# Altium PCB Modulo_Wifi_Pedidos_Domicilo.PcbDoc
Units mm, origin at the board's own origin, x right, y up, seen from the top; angles counter-clockwise.
Board outline 50.04 x 62.22 mm, 2 copper layers (Top Layer, Bottom Layer); 38 components, 41 nets, 155 pads, 48 vias.
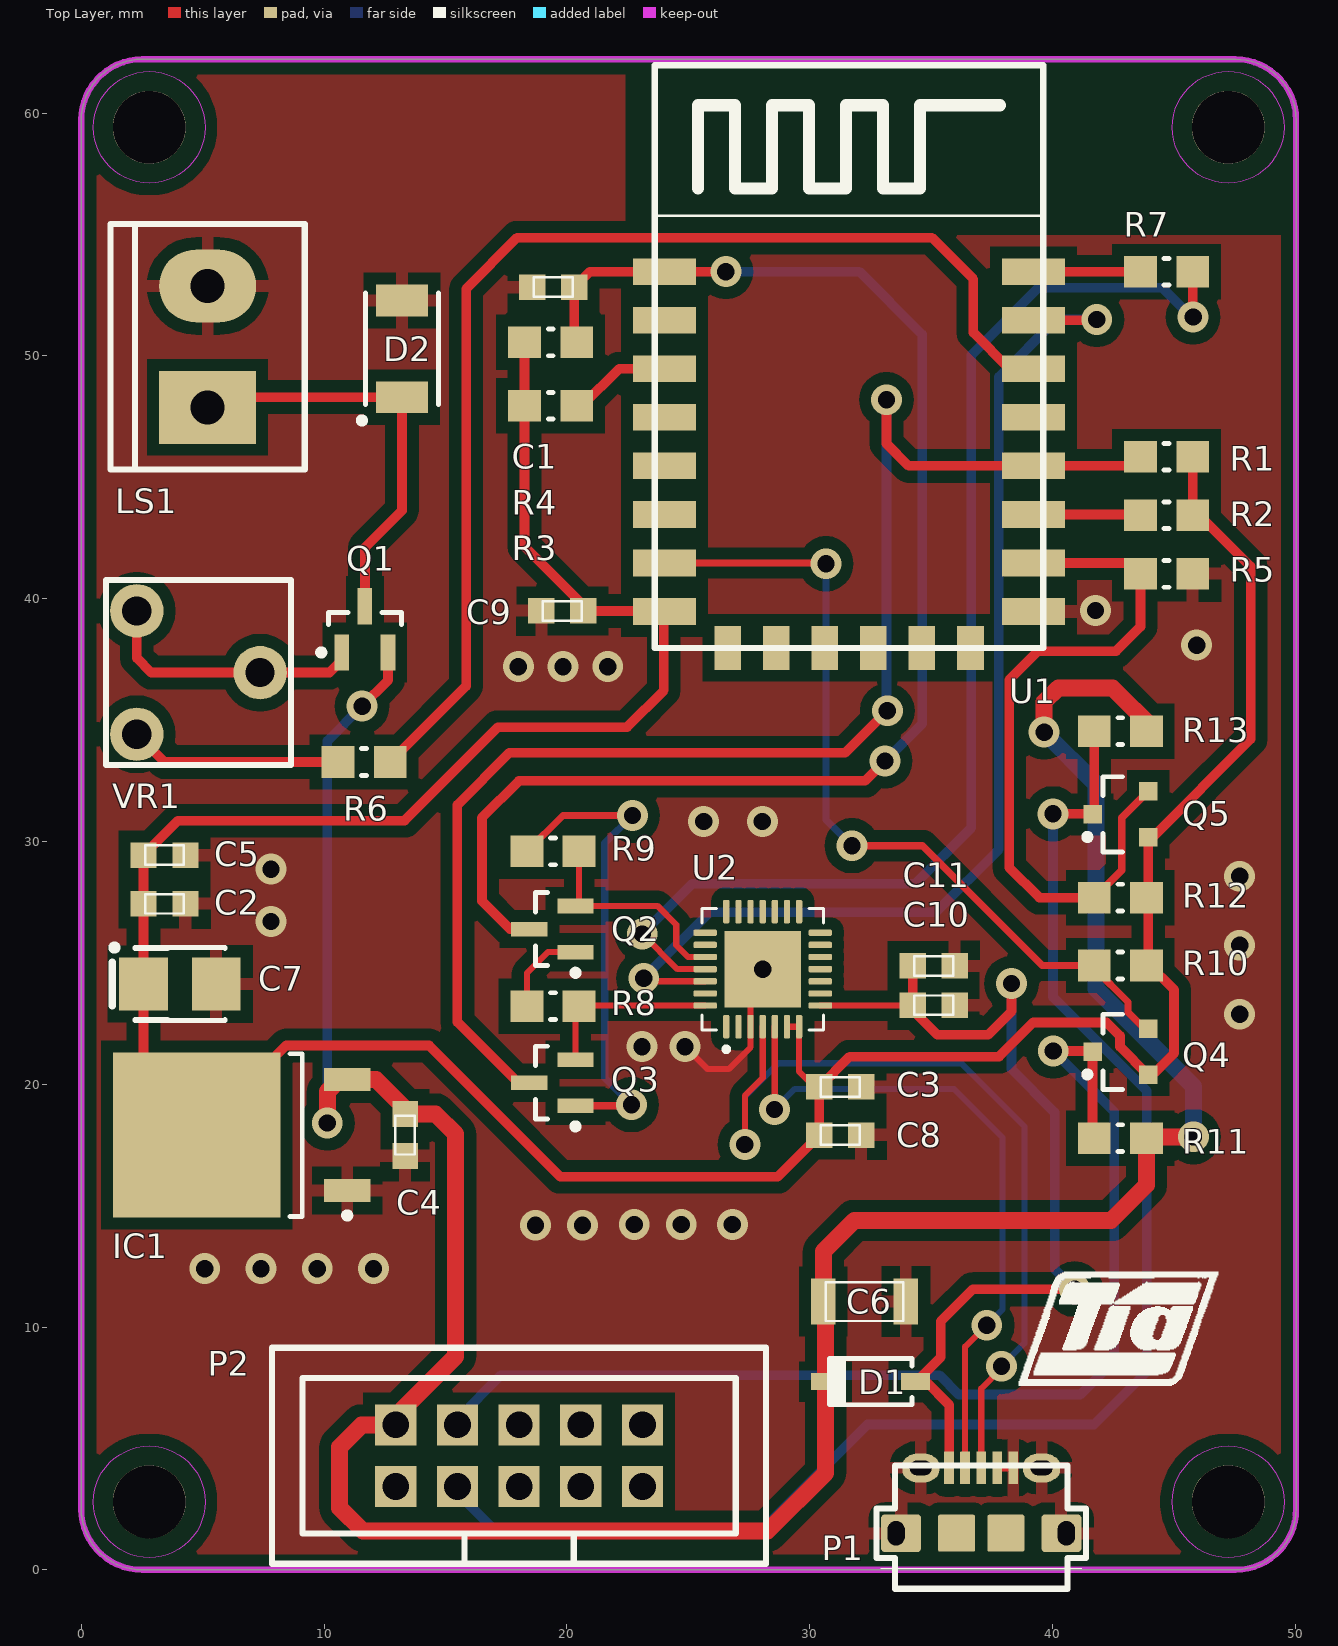
[diagram p0: Top Layer view]
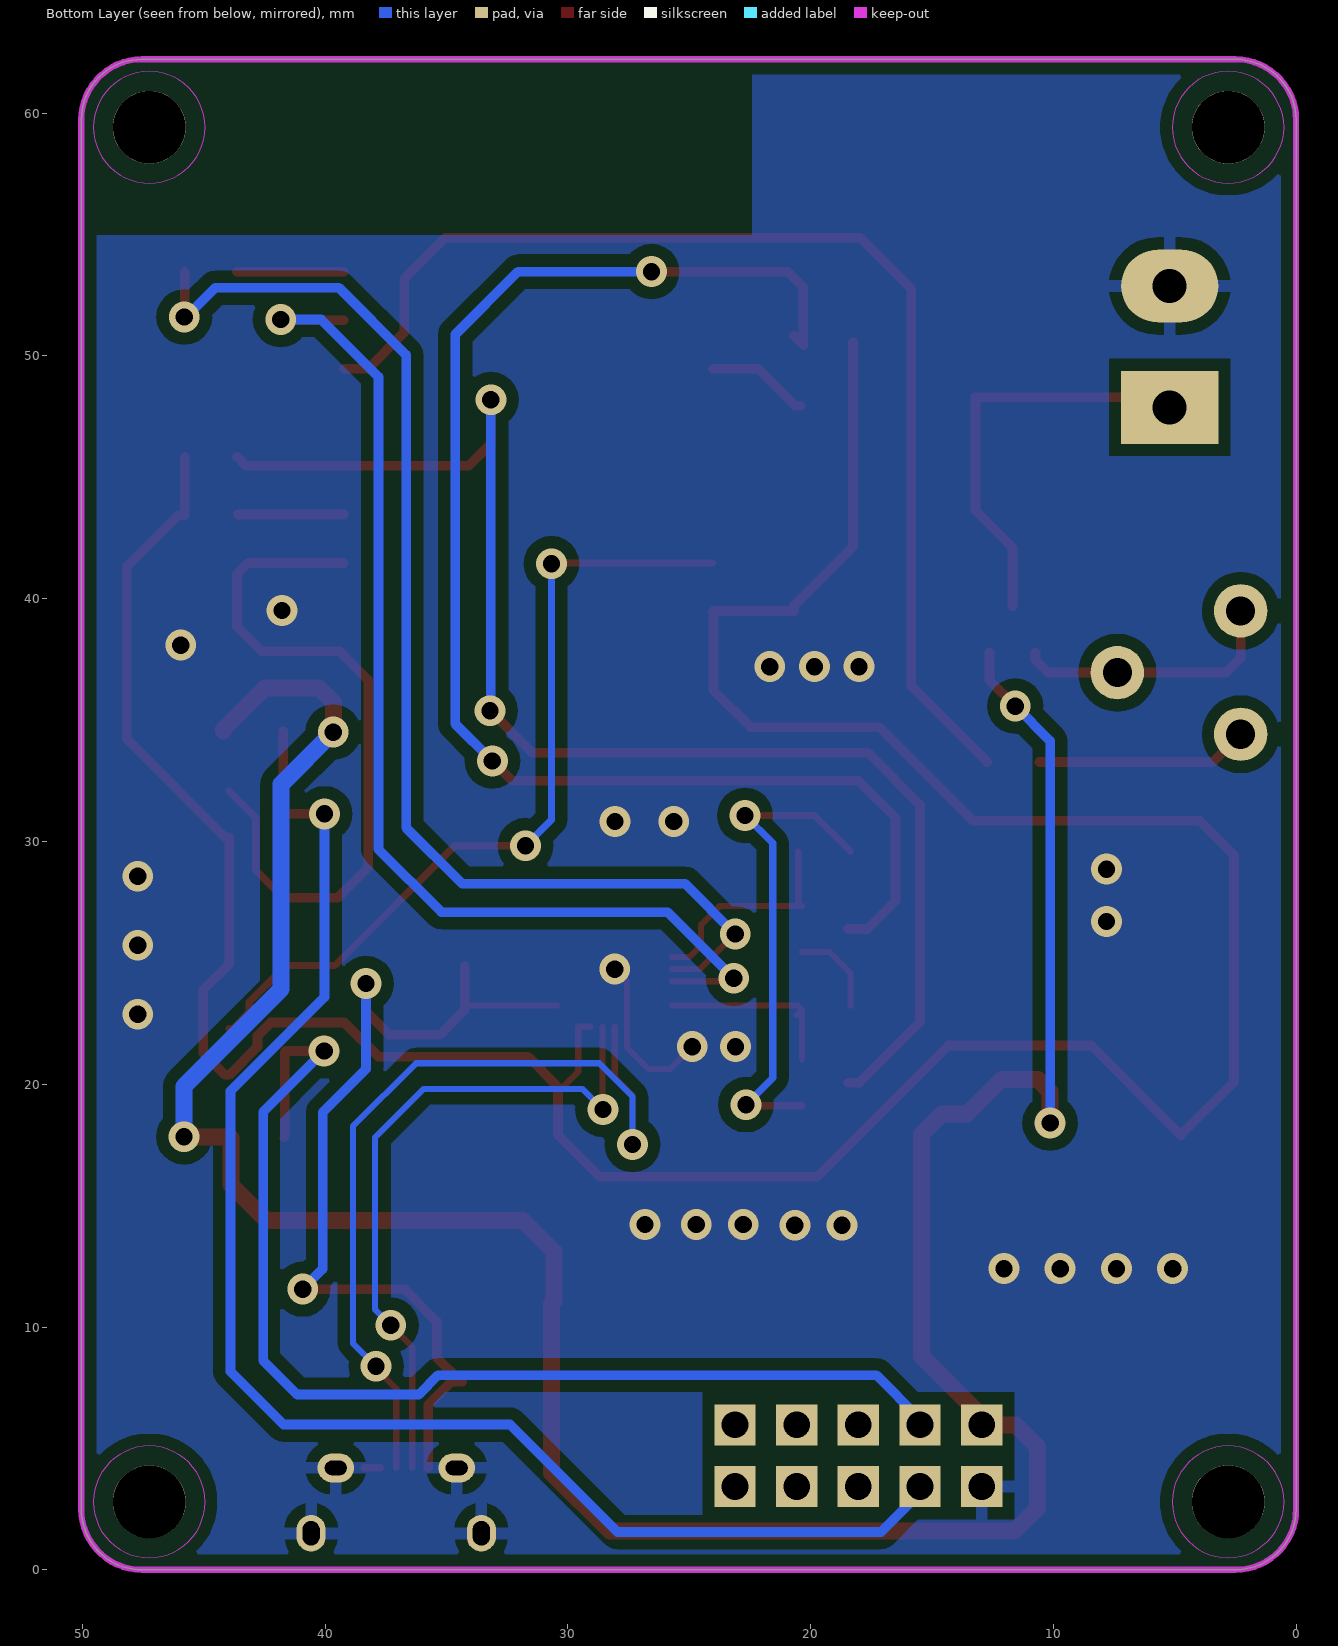
[diagram p1: Bottom Layer view, seen from below]
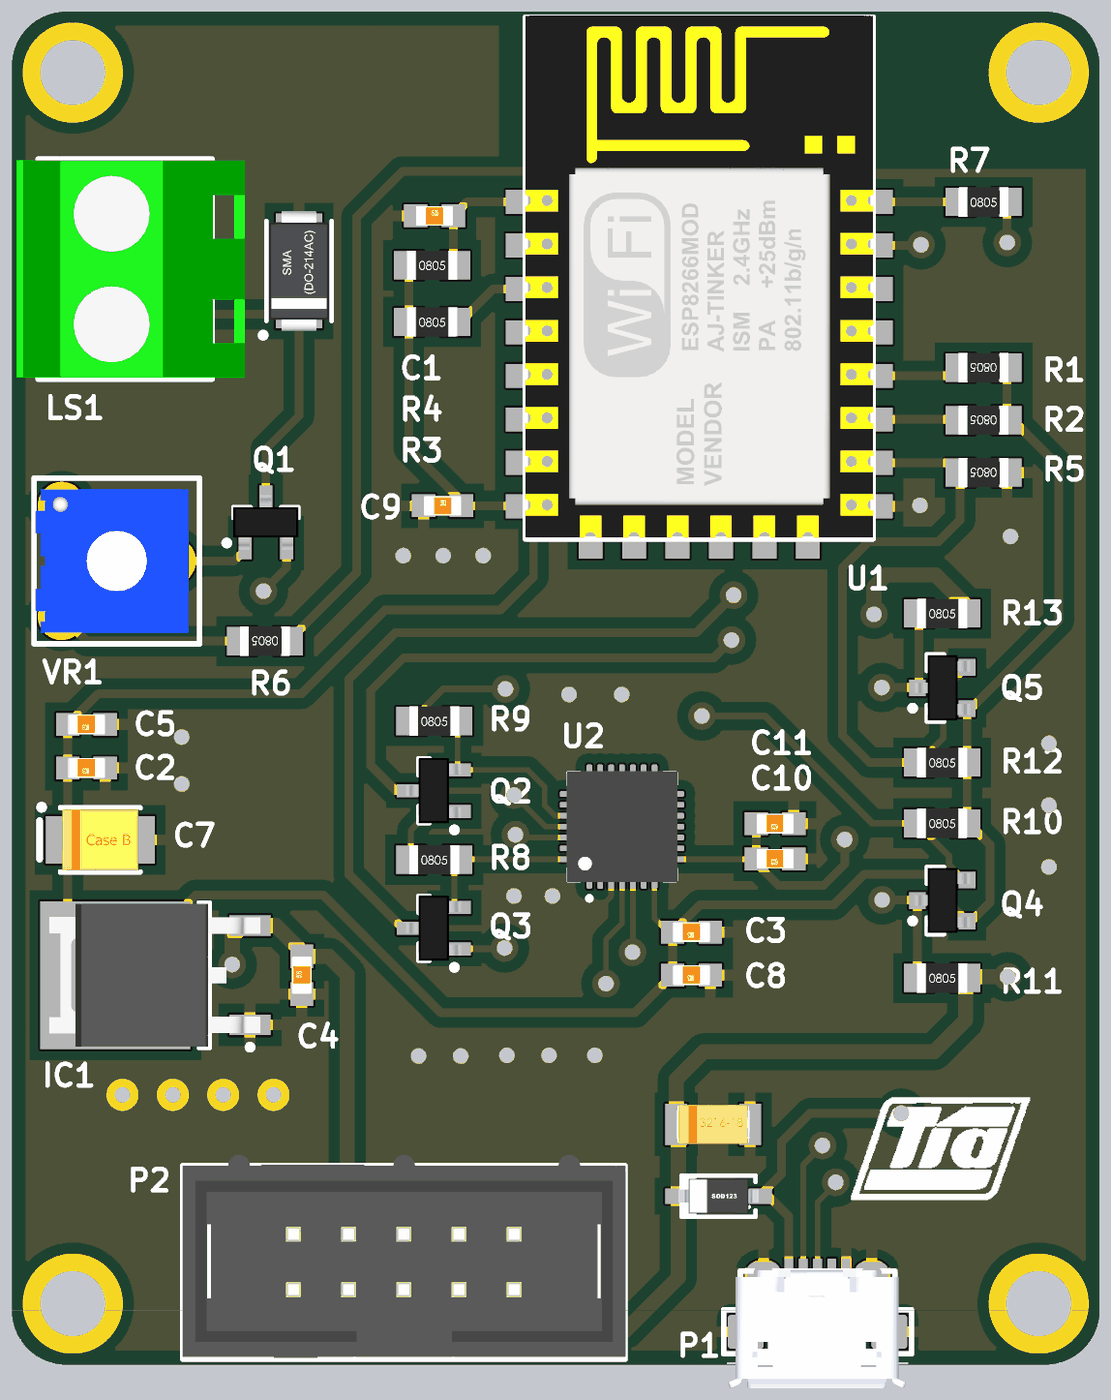
[diagram p2: 3D render of the assembled board from above, using the file's embedded part models]

## Layer stack, top to bottom
Top Solder: solder mask 0.0102, Solder Resist, Dk 3.5
Top Layer: signal copper 0.0356
Dielectric 1: dielectric 0.32, FR-4, Dk 4.8
Bottom Layer: signal copper 0.0356
Bottom Solder: solder mask 0.0102, Solder Resist, Dk 3.5

## Board outline
2.5,0 cw(c2.5,2.5) 0,2.5 0,59.718 cw(c2.5,59.718) 2.5,62.218 47.54,62.218 cw(c47.54,59.718) 50.04,59.718 50.04,2.5 cw(c47.54,2.5) 47.54,0

## Design rules (kind name [scope] priority, off if disabled: settings)
Clearance Polygone [All vs InPolygon] p1: gap=0.5
Clearance CP2102 [InNetClass('CP2102')] p2: gap=0.15
Clearance USB [All vs HasFootprint('USB_MICRO_B_AT')] p3: gap=0.15
Clearance [All] p4: gap=0.254
HoleSize [All] p1: absolutevalues=TRUE maxlimit=10 minlimit=0.025 maxpercent=80.000 minpercent=20.000
MinimumSolderMaskSliver [All] p1: minsoldermaskwidth=0
PolygonConnect GND [InNet('GND') vs IsVia] p1: connectstyle=Direct reliefconductorwidth=0.254 reliefentries=4 polygonreliefangle="90 Angle" airgapwidth=0.254
PolygonConnect [All] p2: connectstyle=Relief reliefconductorwidth=0.5 reliefentries=4 polygonreliefangle="90 Angle" airgapwidth=0.5
RoomDefinition SH4 [InComponentClass('SH4')] p1: confinementstyle=ConfineIn formatcopy=TRUE lockcomponents=FALSE outline -5.588,-8.255 238.379,-8.255 238.379,108.331 -5.588,108.331
RoomDefinition SH3 [InComponentClass('SH3')] p2: confinementstyle=ConfineIn formatcopy=TRUE lockcomponents=FALSE outline -5.588,-8.255 238.379,-8.255 238.379,108.331 -5.588,108.331
RoomDefinition SH2 [InComponentClass('SH2')] p3: confinementstyle=ConfineIn formatcopy=TRUE lockcomponents=FALSE outline -5.588,-8.128 238.252,-8.128 238.252,108.331 -5.588,108.331
RoomDefinition main_sheet [InComponentClass('main_sheet')] p4: confinementstyle=ConfineIn formatcopy=TRUE lockcomponents=FALSE outline -5.588,-8.001 238.125,-8.001 238.125,108.331 -5.588,108.331
RoutingVias [All] p1: holewidth=0.711 width=1.27 viastyle="Through Hole" minholewidth=0.711 minwidth=1.27 maxholewidth=0.711 maxwidth=1.27
SilkToSilkClearance [All] p1: silktosilkclearance=0
SilkToSolderMaskClearance [IsPad] p1: minsilkscreentomaskgap=0 clearancetoexposedcopper=TRUE
SolderMaskExpansion [All] p1: expansion=0.102
Width [All] p1: maxlimit=8 minlimit=0.254 preferedwidth=0.3
26 further rules are at their usual default settings.

## Classes and differential pairs
component class main_sheet: C4 C5 C6 C7 D1 D2 IC1 LS1 P1 P2 Q1 R6 VR1
component class SH2: C1 C2 C3 R1 R2 R3 R4 R5 U1
component class SH3: C8 C9 C10 C11 Q2 Q3 R7 R8 R9 U2
component class SH4: Q4 Q5 R10 R11 R12 R13
net class CP2102: +3.3VDC ACTIVE CTS DCD DSR DTR ESP_RXD0 ESP_TXD0 GND NetR7_2 NetU2_9 NetU2_12 NetU2_18 RI RTS USB_M USB_P VUSB

## Components (designator, comment, footprint, x,y, rotation, side; value= is the part's Value field where it differs from the comment)
C1 "CL10B104KC8NNNC" C0603C104K5RACTU 19.443,52.832 r0 top
C2 "CL10B104KC8NNNC" C0603C104K5RACTU 3.429,27.432 r180 top
C3 "CL10B104KC8NNNC" C0603C104K5RACTU 31.266,19.889 r180 top
C4 "CL10B104KC8NNNC" C0603C104K5RACTU 13.335,17.907 r90 top
C5 "CL10B104KC8NNNC" C0603C104K5RACTU 3.429,29.437 r180 top
C6 "T491A106K010AT2478" "3216 Case-A" 32.262,11.049 r0 top
C7 "T491B107M010AT" TAJB107M006RNJ 4.064,24.13 r0 top
C8 "CL10B104KC8NNNC" C0603C104K5RACTU 31.266,17.907 r180 top
C9 "CL10A106KP8NNNC" C0603C104K5RACTU 19.812,39.497 r0 top
C10 "CL10B104KC8NNNC" C0603C104K5RACTU 35.112,23.256 r180 top
C11 "CL10A106KP8NNNC" C0603C104K5RACTU 35.112,24.877 r180 top
D1 "B5817WS" "Diode S4" 32.512,7.747 r0 top
D2 "SS32" DO-214AC) 13.208,50.292 r90 top
IC1 "LD1117ADT33TR" TO252 6.604,17.907 r180 top
LS1 "KF103-5.0-2P" "VERDE 2pin" 5.207,47.879 r90 top
P1 "C10418" USB_MICRO_B_AT 37.084,1.524 r180 top
P2 "Z-231011010106" IDC5X2 18.034,4.699 r180 top
Q1 "MMBT3906LT1G" SOT-23-TT3_N 11.684,38.735 r90 top
Q2 "MMBT3904LT3G" SOT-23-TT3_N 19.406,26.392 r180 top
Q3 "MMBT3904LT3G" SOT-23-TT3_N 19.406,20.066 r180 top
Q4 "2N7002A-7" SuperSOT-3 42.799,21.336 r180 top
Q5 "2N7002A-7" SuperSOT-3 42.799,31.115 r180 top
R1 "ERJ6RBD1202V" RES-0805 44.704,45.847 r180 top
R2 "ERJ6RBD1202V" RES-0805 44.704,43.434 r180 top
R3 "ERJ6RBD1202V" RES-0805 19.332,47.949 r0 top
R4 "ERJ6RBD1202V" RES-0805 19.332,50.559 r0 top
R5 "ERJ6RBD1202V" RES-0805 44.704,41.021 r180 top
R6 "TC0525D1000T5E" RES-0805 11.647,33.272 r180 top
R7 "0805W8F4700T5E" RES-0805 44.704,53.467 r0 top
R8 "0805W8F1202T5E" RES-0805 19.431,23.217 r0 top
R9 "0805W8F1202T5E" RES-0805 19.431,29.591 r0 top
R10 "0805W8F1002T5E" RES-0805 42.799,24.892 r0 top
R11 "0805W8F1002T5E" RES-0805 42.799,17.78 r0 top
R12 "0805W8F1002T5E" RES-0805 42.799,27.686 r0 top
R13 "0805W8F1002T5E" RES-0805 42.799,34.544 r0 top
U1 "ESP-12F(ESP8266MOD)" "ESP-12E&F Module" 31.623,45.72 r0 top
U2 "CP2102-GMR" QFN50P500X500X100-29N 28.067,24.741 r90 top
VR1 "3362P-1-502LF" "POT LIN VR1" 4.826,36.957 r270 top

## Footprints (in the part's own frame and the unit in brackets; to place one, negate y for a bottom-side part, rotate by r counter-clockwise, add the part's x,y. Pads: shape width x height; smd on the part's side, far side on the other; paste and mask are expansions set on the pad)
"3216 Case-A" [mm] "CAP TANT 10UF 6.3V 20% 1206"
  rect 1x1.9 smd: 1(-1.7,0) 2(1.7,0)
  silkscreen extent -1.6,-0.8 1.6,0.8, body extent -1.7,-0.9 1.7,0.9, height 1.7
C0603C104K5RACTU [mm] "100nF"
  rect 1.08x1.05 smd: 1(-0.865,0) 2(0.865,0)
  silkscreen extent -0.8,-0.4 0.8,0.4, body extent -0.79,-0.41 0.81,0.39, height 0.3
"Diode S4" [mm] "Molded Capacitor, 2-Leads, Body 3,20x1,60mm, IPC Medium Density"
  rect 1.2x0.7 smd: 1(-1.85,0) 2(1.85,0)
  silkscreen extent -1.7,-0.95 1.7,0.95, body extent -1.85,-0.8 1.85,0.8, height 1.27
DO-214AC) [mm] "Molded Diode, 2-Leads, Body 4,31x2,60mm, IPC Medium Density"
  rect 1.3x2.15 smd: 1(-1.99,0) 2(1.99,0)
  silkscreen extent -3.07,-1.5 2.3,1.77, body extent -2.75,-1.4 2.75,1.4, height 2.6
"ESP-12E&F Module" [mm]
  rect 2.6x1.1 smd: 1(-7.6,7.75) 2(-7.6,5.75) 3(-7.6,3.75) 4(-7.6,1.75) 5(-7.6,-0.25) 6(-7.6,-2.25) 7(-7.6,-4.25) 8(-7.6,-6.25) 15(7.6,-6.25) 16(7.6,-4.25) 17(7.6,-2.25) 18(7.6,-0.25) 19(7.6,1.75) 20(7.6,3.75) 21(7.6,5.75) 22(7.6,7.75)
  rect 1.1x1.8 smd: 9(-5,-7.75) 10(-3,-7.75) 11(-1,-7.75) 12(1,-7.75) 13(3,-7.75) 14(5,-7.75)
  silkscreen extent -8,-7.75 8,16.25, body extent -8.01,-7.69 8.01,16.32, height 2.65
IDC5X2 [mm] "IDC5X2"
  rect 1.7x1.7 hole 1.1: 1(-5.08,-1.27) 2(-5.08,1.27) 3(-2.54,-1.27) 4(-2.54,1.27) 5(0,-1.27) 6(0,1.27) 7(2.54,-1.27) 8(2.54,1.27) 9(5.08,-1.27) 10(5.08,1.27)
  silkscreen extent -10.17,-4.45 10.17,4.45, body extent -10.21,-4.95 10.19,4.4, height 9.43
"POT LIN VR1" [mm] "POT LIN VR1"
  round 2.2 hole 1.2: 1(-2.54,-2.54) 2(0,2.54) 3(2.54,-2.54)
  silkscreen extent -3.81,-3.81 3.81,3.81, body extent -3.3,-3.75 3.3,3.3, height 4.7
QFN50P500X500X100-29N [mm]
  rrect50% 0.97x0.26 smd: 1(-2.37,1.5) 2(-2.37,1) 3(-2.37,0.5) 4(-2.37,0) 5(-2.37,-0.5) 6(-2.37,-1) 7(-2.37,-1.5) 15(2.37,-1.5) 16(2.37,-1) 17(2.37,-0.5) 18(2.37,0) 19(2.37,0.5) 20(2.37,1) 21(2.37,1.5)
  rrect50% 0.26x0.97 smd: 8(-1.5,-2.37) 9(-1,-2.37) 10(-0.5,-2.37) 11(0,-2.37) 12(0.5,-2.37) 13(1,-2.37) 14(1.5,-2.37) 22(1.5,2.37) 23(1,2.37) 24(0.5,2.37) 25(0,2.37) 26(-0.5,2.37) 27(-1,2.37) 28(-1.5,2.37)
  rect 3.15x3.15 smd: 29(0,0)
  silkscreen extent -3.4,-2.5 2.5,2.5, body extent -2.55,-2.55 2.55,2.55, height 1
RES-0805 [mm] "Chip Resistor, 2-Leads, Body 2,00x1,25mm, IPC Medium Density"
  rect 1.35x1.3 smd: 1(-1.075,0) 2(1.075,0)
  silkscreen extent -0.1,-0.55 0.1,0.55, body extent -1.15,-0.67 1.15,0.68, height 0.76
SOT-23-TT3_N [mm] "SOT23, 3-Leads, Body 2.9x1.3mm, Pitch 0.95mm, Lead Span 2.4mm, IPC Medium Density"
  rect 1.5x0.6 smd: 1(-0.95,0.95) 2(-0.95,-0.95) 3(0.95,0)
  silkscreen extent -1.07,-1.5 0.7,1.92, body extent -1.27,-1.5 1.27,1.5, height 1.1
SuperSOT-3 [mm] "SOT23, 3-Leads, Body 2,98x2,52mm, Pitch 0,95mm, IPC Medium Density"
  rect 0.76x0.76 smd: 1(-1.145,-0.95) 2(-1.145,0.95) 3(1.145,0)
  silkscreen extent -0.09,-1.55 1.48,1.55, body extent -1.29,-1.51 1.25,1.49, height 1.1
TAJB107M006RNJ [mm] "Capacitor, SM Tantalum; Body 3.5 x 2.8 mm (LxW typ)"
  rect 2x2.2 smd: 1(-1.5,0) 2(1.5,0)
  silkscreen extent -2.82,-1.5 1.85,1.62, body extent -1.75,-1.4 1.75,1.4, height 1.9
TO252 [mm] "D-PAK, 3-Pads, Body 6.2x6.7mm (max), IPC Medium Density"
  rect 1.9x0.95 smd: 1(-4.35,2.285) 3(-4.35,-2.285)
  rect 6.9x6.8 smd: 4(1.85,0)
  silkscreen extent -4.47,-3.35 -2,3.43, body extent -4.83,-3.29 4.87,3.29, height 2.3
USB_MICRO_B_AT [mil] "USB_MICRO_B_AT"
  oval 47.24x59.06 hole 27.56 slot 39.37 at 90 deg: 0(-137.33,0.67) 0(138.67,0.67)
  rrect20% 65x61 smd: 0(-129.33,0.67) 0(130.67,0.67)
  oval 59.06x47.24 hole 23.62 slot 35.43 at 0 deg: 0(-97.33,-105.33) 0(98.67,-105.33)
  rrect80% 60x40 smd: 0(-97.33,-105.33) 0(98.67,-105.33)
  rrect10% 16x53 smd: 1(52.67,-105.33) 2(26.67,-105.33) 3(0.67,-105.33) 4(-51.33,-105.33) 4(-25.33,-105.33)
  rrect10% 60x60 smd: S1(40.67,0.67) S2(-39.33,0.67)
  silkscreen extent -169,-109 171,91, body extent -160,-111 163,103, height 105
"VERDE 2pin" [mm] "bornera verde"
  rect 3x4 hole 1.4: 1(0,0)
  oval 3x4 hole 1.4: 2(5,0)
  silkscreen extent -2.56,-4 7.56,4, body extent -2.5,-5.51 7.5,4.99, height 14

## Part data
C1 C2 C3 C4 C5 C8 C9 C10 C11: library part "Cap 100nF (0603)"
C6: library part T491A106M006AT, "CAP TANT 10UF 6.3V 20% 1206"
C7: library part "Cap 10uF (C3216)", "Capacitor"
D1: library part 1N5817
D2: library part CD214A-B340LF, "DIODE SCHOTTKY 40V 3A SMA"
IC1: library part LM1117DT, "800mA Low-Dropout Linear Regulator"
LS1: library part Speaker, "Speaker"
P1: library part "USB Mini", "USB Micro"
P2: library part "IDC  5X2", "Header, 5-Pin, Dual row"
Q1: library part 2N3906
Q2 Q3: library part 2N3904
Q4 Q5: library part "MOSFET N channel", "N-Channel MOSFET"
R1 R2 R3 R4 R5 R6 R7 R8 R9 R10 R11 R12 R13: library part Resistor, "Resistor"
U1: library part "ESP-12E&F Module", "ESP-12E&F Module"
U2: library part CP2102-GM
VR1: library part "Trimmer Cermet 104", "Trimmer Cermet 104"

## Free pads (board coordinates)
  round 3 hole 3 unplated: ""(2.8,2.8) ""(2.8,59.418) ""(47.24,2.8) ""(47.24,59.418)

## Via types
v1: diameter 1.27, hole 0.711, Top Layer to Bottom Layer, tented both sides, 43 vias
v2: diameter 1.27, hole 0.711, Top Layer to Bottom Layer, 4 vias
v3: diameter 1.27, hole 0.711, Top Layer to Bottom Layer, tented bottom, 1 vias

## Nets (pads, with @x,y where several pads share a name; then routed paths per layer and width w, separated by ;. In a path a pad name is that pad's centre, name@x,y a point inside that pad or via, vN(x,y) a via of type N, cw(c..) or ccw(c..) an arc to the next point about the centre after c; other vN are vias at no path point)
+3.3VDC: C2.2 C3.2 C5.2 C7.1 C8.2 C9.2 IC1.4 Q4.2 Q5.2 R1.1 R2.1 R3.1 R4.1 R10.2 R12.2 U1.8 U2.6 U2.7 | length 136.3
  Top Layer w0.254: U2.6 U2.7 29.567,20.519 C3.2@30.401,19.685
  Top Layer w0.4: R4.1 R3.1 18.257,42.145 20.677,39.725 C9.2 U1.8@23.996,39.497 ; U1.8 U1.8@23.996,39.497 ; R1.1 R2.1 46.058,43.434 48.166,41.326 48.166,34.214 44.117,30.165 Q5.2 43.944,24.962 45.01,23.896 45.01,21.273 44.123,20.386 Q4.2 42.783,21.547 42.783,21.995 42.231,22.547 39.208,22.547 37.797,21.136 31.648,21.136 C3.2 30.401,19.685 C8.2 28.681,16.187 19.733,16.187 14.328,21.592 8.439,21.592 IC1.4 2.564,20.097 C7.1 C2.2 2.564,29.21 C5.2 3.981,30.854 13.313,30.854 17.167,34.708 22.478,34.708 23.996,36.226 U1.8@23.996,39.497
+5VDC: C4.2 C6.1 D1.1 IC1.3 P2.9 Q1.2 R11.2 R13.2 | length 121.2
  Top Layer w0.4: v1(11.569,35.574) 12.634,36.639 Q1.2
  Top Layer w0.7: v1(10.134,18.4) 10.134,19.694 10.632,20.192 IC1.3 12.143,20.192 13.563,18.772 14.595,18.772 15.423,17.944 15.423,8.796 12.954,6.327 P2.9 11.551,5.969 10.645,5.063 10.645,2.55 11.603,1.592 28.262,1.592 30.662,3.992 D1.1 30.662,10.949 C6.1 30.562,13.109 31.84,14.387 42.417,14.387 43.874,15.844 R11.2 43.929,17.835 v1(45.806,17.835) ; v1(39.659,34.503) 39.659,35.739 40.243,36.323 42.48,36.323 44.172,34.631 R13.2@44.172,34.544
  Bottom Layer w0.4: v1(10.134,18.4) 10.134,34.139 v1(11.569,35.574)
  Bottom Layer w0.7: v1(39.659,34.503) 41.805,32.357 41.805,23.917 45.806,19.916 v1(45.806,17.835)
ACTIVE: U2.11
ADC: U1.2
CTS: U2.23
DCD: U2.1
DSR: U2.27
DTR: Q3.2 R8.2 U2.28 | length 7.6
  Top Layer w0.254: Q3.2 20.356,23.067 R8.2@20.574,22.849 ; R8.2 20.53,23.241 U2.28
EN: R3.2 U1.3 | length 4.2
  Top Layer w0.4: R3.2 20.634,47.949 22.155,49.47 U1.3
ESP_RXD0: U1.21 U2.26 | length 46.5
  Top Layer w0.254: v1(23.167,24.367) 23.293,24.241 U2.26
  Top Layer w0.4: U1.21 41.797,51.47 v1(41.826,51.499)
  Bottom Layer w0.4: v1(23.167,24.367) 25.889,27.089 35.209,27.089 37.795,29.675 37.795,49.136 40.158,51.499 v1(41.826,51.499)
ESP_RXD2: Q4.1 R10.1 U1.7 | length 34.4
  Top Layer w0.3: U1.7 30.645,41.47 v1(30.675,41.44) ; v1(31.744,29.826) 34.653,29.826 39.587,24.892 R10.1 41.724,24.78 43.116,23.388 43.116,22.963 43.793,22.286 Q4.1
  Bottom Layer w0.3: v1(30.675,41.44) 30.675,30.895 v1(31.744,29.826)
ESP_TXD0: R7.1 U1.22 | length 4.4
  Top Layer w0.4: U1.22 43.626,53.47 R7.1
ESP_TXD2: Q5.1 R5.2 R12.1 U1.16 | length 30.1
  Top Layer w0.3: R12.1 42.857,28.819 42.857,30.978 Q5.1
  Top Layer w0.4: U1.16 43.18,41.47 R5.2 43.629,38.849 42.617,37.837 39.401,37.837 38.222,36.658 38.222,28.93 39.466,27.686 R12.1
FLASH: Q3.3 R1.2 U1.18 | length 57.9
  Top Layer w0.4: Q3.3 17.981,20.066 15.492,22.555 15.492,31.505 17.642,33.655 31.472,33.655 v1(33.201,35.384) ; v1(33.169,48.196) 33.169,46.382 34.081,45.47 U1.18 43.252,45.47 R1.2
  Bottom Layer w0.4: v1(33.169,48.196) 33.169,35.483 33.136,35.45 v1(33.201,35.384)
GND: C1.1 C2.1 C3.1 C4.1 C5.1 C6.2 C7.2 C8.1 C9.1 C10.1 C11.1 D2.2 IC1.1 LS1.2 P1.0 P1.4 P2.10 R5.1 U1.15 U2.3 U2.29 | length 7.5
  Top Layer w0.254: v1(24.871,21.549) 25.795,20.625 26.661,20.625 27.567,21.531 U2.3 27.567,24.241 v3(28.067,24.741)
  Top Layer w0.3: P1.4@37.727,4.199 P1.4@38.388,4.199
  other v1: 18.711,14.191 20.648,14.191 22.775,14.223 24.712,14.223 26.818,14.223 23.097,21.549 47.713,22.885 47.713,25.726 7.811,26.7 47.713,28.567 7.811,28.86 25.634,30.819 28.054,30.819 18.003,37.201 19.842,37.201 21.682,37.201 45.941,38.086 41.777,39.515
  other v2: 5.087,12.404 7.404,12.404 9.721,12.404 12.038,12.404
GPIO2: R2.2 U1.17 | length 4.4
  Top Layer w0.4: U1.17 R2.2@43.593,43.47
GPIO4: U1.19
GPIO5: R6.1 U1.20 | length 48.6
  Top Layer w0.4: R6.1 15.852,36.402 15.852,52.763 17.957,54.868 35.034,54.868 36.741,53.161 36.741,50.957 38.228,49.47 U1.20
GPIO9: U1.11
GPIO10: U1.12
GPIO12: U1.6
GPIO14: U1.5
GPIO16: U1.4
H_RX: P2.8 Q5.3 R13.1 | length 61.7
  Top Layer w0.3: Q5.3 Q5.3@41.724,31.185
  Top Layer w0.4: v1(40.024,31.138) 41.599,31.138 Q5.3@41.638,31.099 ; Q5.3@41.724,31.185 R13.1
  Bottom Layer w0.254: P2.8@15.494,3.162 P2.8
  Bottom Layer w0.4: P2.8@15.494,3.162 17.1,1.556 27.956,1.556 32.384,5.984 41.711,5.984 43.892,8.165 43.892,19.718 40.024,23.586 v1(40.024,31.138)
H_TX: P2.7 Q4.3 R11.1 | length 47.9
  Top Layer w0.3: R11.1@41.654,17.85 R11.1
  Top Layer w0.4: v1(40.037,21.369) Q4.3@41.621,21.369 ; R11.1@41.654,17.85 Q4.3
  Bottom Layer w0.4: P2.7 15.494,6.221 17.29,8.017 35.34,8.017 36.139,7.218 41.149,7.218 42.549,8.618 42.549,18.857 v1(40.037,21.369)
NetD2_1: D2.1 LS1.1 Q1.3 | length 17.4
  Top Layer w0.4: LS1.1 5.63,48.302 D2.1 13.208,43.632 11.684,42.108 Q1.3
NetQ1_1: Q1.1 VR1.1 VR1.2 | length 11.2
  Top Layer w0.4: VR1.1 2.286,37.552 2.881,36.957 VR1.2 10.223,36.957 10.734,37.468 Q1.1
NetQ2_1: Q2.1 R8.1 | length 3.7
  Top Layer w0.254: R8.1 18.356,24.579 19.219,25.442 Q2.1
NetQ3_1: Q3.1 R9.1 | length 20.1
  Top Layer w0.3: R9.1 19.838,31.073 v1(22.703,31.073) ; Q3.1 22.621,19.116 v1(22.664,19.159)
  Bottom Layer w0.3: v1(22.664,19.159) 21.564,20.259 21.564,29.934 v1(22.703,31.073)
NetR6_2: R6.2 VR1.3 | length 8.8
  Top Layer w0.4: VR1.3 3.431,33.272 R6.2
NetR7_2: R7.2 U2.25 | length 50.8
  Top Layer w0.254: v1(23.104,26.193) 24.556,24.741 U2.25
  Top Layer w0.4: R7.2 45.779,51.549 45.797,51.567 v1(45.797,51.602)
  Bottom Layer w0.4: v1(23.104,26.193) 25.17,28.259 34.353,28.259 36.659,30.565 36.659,50.035 39.435,52.811 44.517,52.811 45.726,51.602 v1(45.797,51.602)
NRST: C1.2 Q2.3 R4.2 U1.1 | length 60.1
  Top Layer w0.4: Q2.3 17.66,26.392 16.502,27.55 16.502,30.978 18.023,32.499 32.288,32.499 v1(33.107,33.318) ; R4.2@20.283,50.435 20.308,50.46 C1.2 20.946,53.47 U1.1 ; R4.2 R4.2@20.684,50.836 ; U1.1@24.024,53.471 v1(26.55,53.471)
  Bottom Layer w0.4: v1(26.55,53.471) 32.046,53.471 34.636,50.881 34.636,34.847 v1(33.107,33.318)
RI: U2.2
RTS: Q2.2 R9.2 U2.24 | length 8.8
  Top Layer w0.254: Q2.2 23.739,27.342 24.509,26.572 24.509,25.724 24.992,25.241 U2.24 ; Q2.2@20.506,27.492 R9.2
SPI_INT: U1.13
SPI_MISO: U1.10
SPI_MOSI: U1.9
SPI_SCK: U1.14
USB_M: P1.2 U2.5 | length 28.2
  Top Layer w0.254: v1(28.551,18.964) 28.567,18.979 U2.5 ; P1.2 36.407,9.189 v1(37.293,10.075)
  Bottom Layer w0.254: v1(28.551,18.964) 29.397,19.809 35.938,19.809 37.938,17.809 37.938,10.72 v1(37.293,10.075)
USB_P: P1.3 U2.4 | length 35.1
  Top Layer w0.254: v1(27.333,17.518) 27.333,19.531 28.067,20.265 U2.4 ; P1.3 37.067,7.464 v1@37.899,8.296
  Top Layer w0.4: v1@37.899,8.296 v1(37.899,8.383)
  Bottom Layer w0.254: v1(27.333,17.518) 27.333,19.494 28.707,20.868 36.246,20.868 38.848,18.266 38.848,9.332 v1(37.899,8.383)
VUSB: C10.2 C11.2 D1.2 P1.1 U2.8 | length 38.7
  Top Layer w0.254: U2.8 34.232,23.241 C10.2 ; C10.2@34.247,23.056 C10.2@34.247,23.226
  Top Layer w0.4: C10.2@34.247,23.056 35.269,22.034 37.347,22.034 38.314,23.001 v1(38.314,24.146) ; C10.2 C11.2 ; P1.1 35.746,6.799 34.798,7.747 D1.2 34.395,7.747 35.399,8.751 35.399,10.232 36.727,11.56 v1(40.917,11.56)
  Bottom Layer w0.4: v1(38.314,24.146) 38.314,20.627 40.095,18.846 40.095,12.382 v1(40.917,11.56)
pads on no net: P1.S1 P1.S2 P2.1 P2.2 P2.3 P2.4 P2.5 P2.6 U2.9 U2.10 U2.12 U2.13 U2.14 U2.15 U2.16 U2.17 U2.18 U2.19 U2.20 U2.21 U2.22

## Polygon pours and split planes (outlines as drawn)
GND on Top Layer "PolygoneTOP" (solid, pour order 0): 2.5,0 cw(c2.5,2.5) 0,2.5 0,59.718 cw(c2.5,59.718) 2.5,62.218 22.408,62.218 22.408,54.976 50.04,54.976 50.04,2.5 cw(c47.54,2.5) 47.54,0
GND on Bottom Layer "PolygoneBOTTOM" (solid, pour order 1): 2.5,0 cw(c2.5,2.5) 0,2.5 0,59.718 cw(c2.5,59.718) 2.5,62.218 22.408,62.218 22.408,54.976 50.04,54.976 50.04,2.5 cw(c47.54,2.5) 47.54,0

## Keep-outs
Keep-Out Layer:
  region: 2.8,57.118 cw(c2.8,59.418) 0.5,59.418 cw(c2.8,59.418) 2.8,61.718 cw(c2.8,59.418) 5.1,59.418 cw(c2.8,59.418)
  region: 47.24,57.118 cw(c47.24,59.418) 44.94,59.418 cw(c47.24,59.418) 47.24,61.718 cw(c47.24,59.418) 49.54,59.418 cw(c47.24,59.418)
  region: 2.8,0.5 cw(c2.8,2.8) 0.5,2.8 cw(c2.8,2.8) 2.8,5.1 cw(c2.8,2.8) 5.1,2.8 cw(c2.8,2.8)
  region: 47.24,0.5 cw(c47.24,2.8) 44.94,2.8 cw(c47.24,2.8) 47.24,5.1 cw(c47.24,2.8) 49.54,2.8 cw(c47.24,2.8)
  lines w0.254: 0,2.5 ccw(c2.5,2.5) 2.5,0 47.54,0 ccw(c47.54,2.5) 50.04,2.5 50.04,59.718 ccw(c47.54,59.718) 47.54,62.218 2.5,62.218 ccw(c2.5,59.718) 0,59.718 0,2.5

## Silkscreen, mask and mechanical layers (free items; w line width, h text height)
Top Overlay:
  drawing of 462 lines, arcs and shapes, not listed
Top Solder:
  region: 2.8,57.118 cw(c2.8,59.418) 0.5,59.418 cw(c2.8,59.418) 2.8,61.718 cw(c2.8,59.418) 5.1,59.418 cw(c2.8,59.418)
  region: 47.24,57.118 cw(c47.24,59.418) 44.94,59.418 cw(c47.24,59.418) 47.24,61.718 cw(c47.24,59.418) 49.54,59.418 cw(c47.24,59.418)
  region: 2.8,0.5 cw(c2.8,2.8) 0.5,2.8 cw(c2.8,2.8) 2.8,5.1 cw(c2.8,2.8) 5.1,2.8 cw(c2.8,2.8)
  region: 47.24,0.5 cw(c47.24,2.8) 44.94,2.8 cw(c47.24,2.8) 47.24,5.1 cw(c47.24,2.8) 49.54,2.8 cw(c47.24,2.8)
Bottom Solder:
  region: 2.8,57.118 cw(c2.8,59.418) 0.5,59.418 cw(c2.8,59.418) 2.8,61.718 cw(c2.8,59.418) 5.1,59.418 cw(c2.8,59.418)
  region: 47.24,57.118 cw(c47.24,59.418) 44.94,59.418 cw(c47.24,59.418) 47.24,61.718 cw(c47.24,59.418) 49.54,59.418 cw(c47.24,59.418)
  region: 2.8,0.5 cw(c2.8,2.8) 0.5,2.8 cw(c2.8,2.8) 2.8,5.1 cw(c2.8,2.8) 5.1,2.8 cw(c2.8,2.8)
  region: 47.24,0.5 cw(c47.24,2.8) 44.94,2.8 cw(c47.24,2.8) 47.24,5.1 cw(c47.24,2.8) 49.54,2.8 cw(c47.24,2.8)
Outline:
  the board outline again, w0.254